# EAGLE board MotorController (EAGLE 7.2.0)
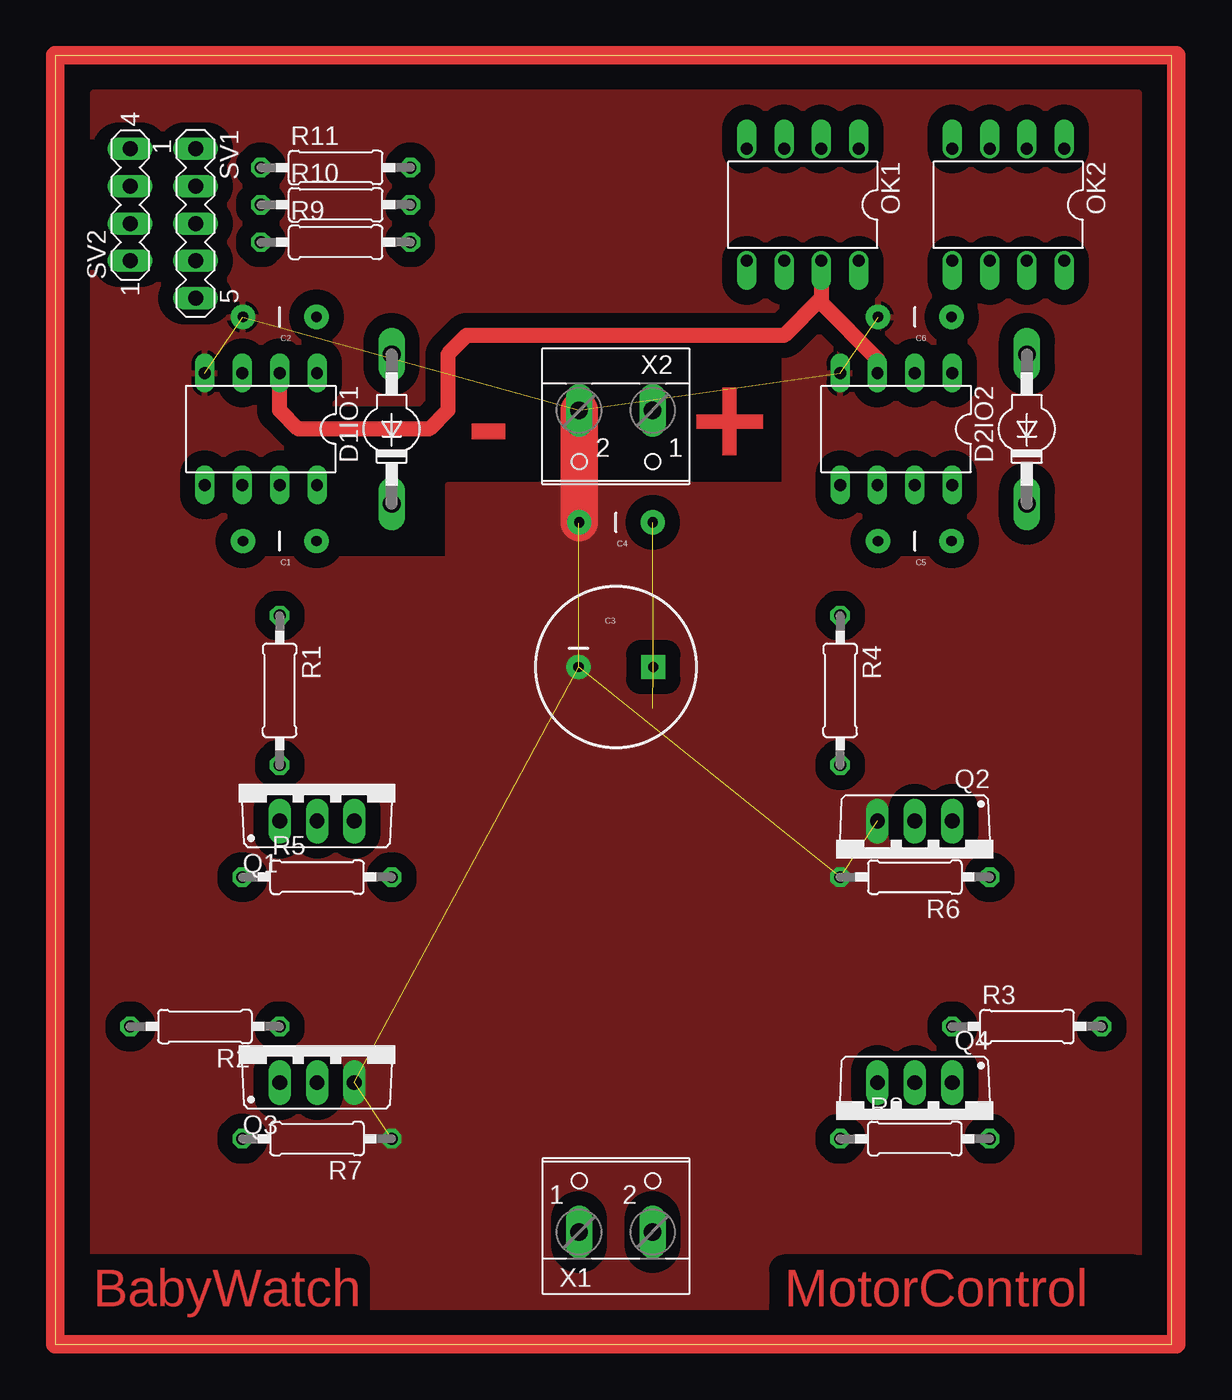
[diagram p0: board, top side]
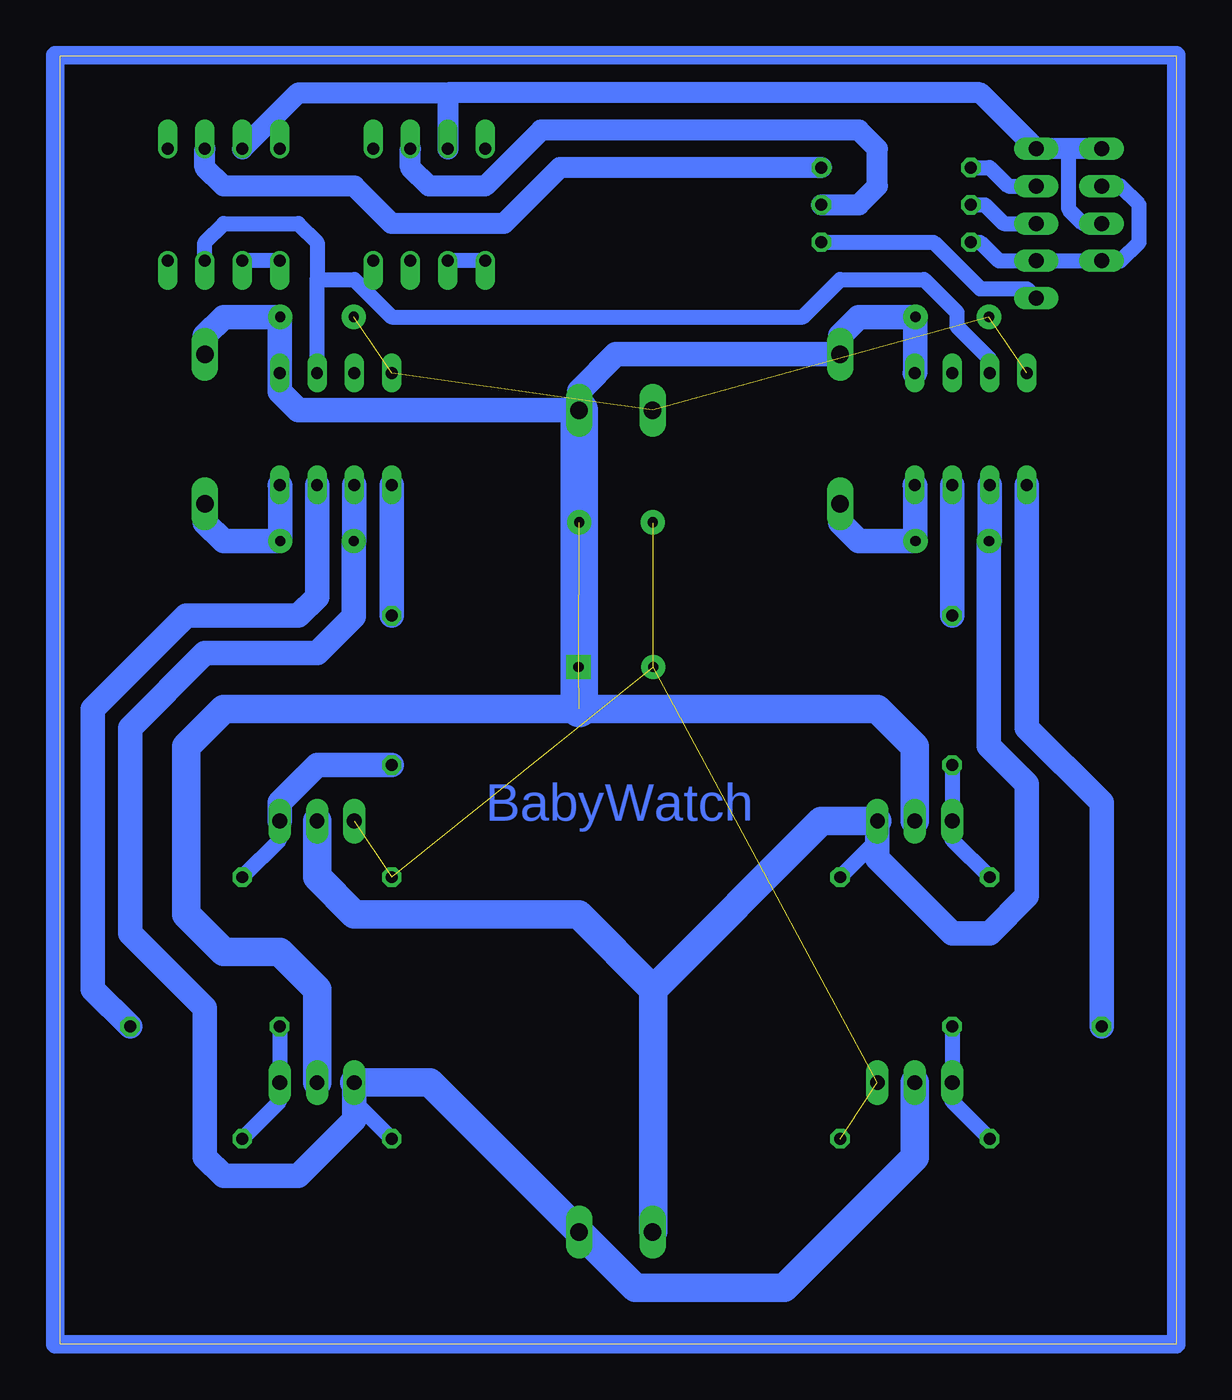
[diagram p1: board, bottom side, seen from below]

Size 75.87 x 87.62 mm. Coordinates in mm from the lower left corner, seen from the top.
Outline: 0,0 75.87,0 75.87,87.62 0,87.62 0,0
Copper layers (1*16): Top 0.035mm / dielectric 1.5mm / Bottom 0.035mm
Design rules "default": minimum track width 10mil, minimum drill 24mil, track to track 8mil, track to pad 8mil, pad to pad 8mil, via to via 8mil, smd to smd 8mil, copper to edge 40mil, drill to drill 8mil, minimum pad ring 10mil, minimum via ring 8mil, stop-mask expansion 4mil, vias tented up to drill 0mil, thermal gap 10mil

## Footprints (pad centres in the part's own frame; a part is rotated, then mirrored left to right if it is on the bottom)
CAP-PTH-5MM = drill 0.7 pad 1.651: 1 -2.5,0; 2 2.5,0
CPOL-RADIAL-1000UF-25V = drill 0.7 pad 1.651 square: 1 2.54,0 | drill 0.7 pad 1.651: 2 -2.54,0
SOD57-10 = drill 1.194 long: A 5.08,0; C -5.08,0
DIL08 = drill 0.813 long: 1 -3.81,-3.81; 2 -1.27,-3.81; 3 1.27,-3.81; 4 3.81,-3.81; 5 3.81,3.81; 6 1.27,3.81; 7 -1.27,3.81; 8 -3.81,3.81
DIL08' = drill 0.813 offset: 1 -3.81,-3.81; 2 -1.27,-3.81; 3 1.27,-3.81; 4 3.81,-3.81; 5 3.81,3.81; 6 1.27,3.81; 7 -1.27,3.81; 8 -3.81,3.81
TO220BV = drill 1.016 long: D 0,-2.54; G -2.54,-2.54; S 2.54,-2.54
0207/10 = drill 0.813 octagon: 1 -5.08,0; 2 5.08,0
MA05-1 = drill 1.016 long: 1 -5.08,0; 2 -2.54,0; 3 0,0; 4 2.54,0; 5 5.08,0
MA04-1 = drill 1.016 long: 1 -3.81,0; 2 -1.27,0; 3 1.27,0; 4 3.81,0
W237-102 = drill 1.194 long: 1 -2.5,-1.27; 2 2.5,-1.27

## Placement (x,y rotation side)
C1  22uF  [CAP-PTH-5MM]  15.24,54.61 180 top
C2  100nF  [CAP-PTH-5MM]  15.24,69.85 180 top
C3  4700uF  [CPOL-RADIAL-1000UF-25V]  38.1,46.04 0 top
C4  1uF  [CAP-PTH-5MM]  38.1,55.88 180 top
C5  22uF  [CAP-PTH-5MM]  58.42,54.61 180 top
C6  100nF  [CAP-PTH-5MM]  58.42,69.85 180 top
D1  BYV95  [SOD57-10]  22.86,62.23 90 top
D2  BYV95  [SOD57-10]  66.04,62.23 90 top
IO1  IR2101  [DIL08]  13.97,62.23 180 top
IO2  IR2101  [DIL08]  57.15,62.23 180 top
OK1  HCPL2200  [DIL08']  50.8,77.47 180 top
OK2  HCPL2200  [DIL08']  64.77,77.47 180 top
Q1  IRF512  [TO220BV]  17.78,38.1 0 top
Q2  IRF512  [TO220BV]  58.42,33.02 180 top
Q3  IRF512  [TO220BV]  17.78,20.32 0 top
Q4  IRF512  [TO220BV]  58.42,15.24 180 top
R1  10 Ohm  [0207/10]  15.24,44.45 270 top
R2  10 Ohm  [0207/10]  10.16,21.59 180 top
R3  10 Ohm  [0207/10]  66.04,21.59 0 top
R4  10 Ohm  [0207/10]  53.34,44.45 270 top
R5  1kOhm  [0207/10]  17.78,31.75 0 top
R6  1kOhm  [0207/10]  58.42,31.75 180 top
R7  1kOhm  [0207/10]  17.78,13.97 180 top
R8  1kOhm  [0207/10]  58.42,13.97 0 top
R9  10 Ohm  [0207/10]  19.05,74.93 0 top
R10  620 Ohm  [0207/10]  19.05,77.47 0 top
R11  620 Ohm  [0207/10]  19.05,80.01 0 top
SV1  [MA05-1]  9.53,76.2 270 top
SV2  [MA04-1]  5.08,77.47 90 top
X1  [W237-102]  38.1,8.89 0 top
X2  [W237-102]  38.1,62.23 180 top

## Library data of the parts
C1-C6 = SparkFun-Passives
D1 D2 = diode
IO1 IO2 = drivers
OK1 OK2 = optocoupler; MF: AGILENT TECHNOLOGIES; MPN: HCPL-2200; OC_FARNELL: 326720; OC_NEWARK: 06F5425
Q1-Q4 = transistor-power
R1-R11 = rcl
SV1 SV2 = con-lstb; OC_FARNELL: unknown; OC_NEWARK: unknown
X1 X2 = con-wago-500; MPN: 237-102; OC_FARNELL: unknown; OC_NEWARK: 70K9898

## Nets
+3V3: R9.2 SV1.5
AGND: OK1.3 OK2.3 SV1.1 SV2.2 SV2.4
ES_SIG: R9.1 SV1.4 SV2.1 SV2.3
GND: C2.2 C3.2 C4.2 C6.2 IO1.4 IO2.4 Q2.S Q3.S R6.2 R7.1 X2.2
M_A: IO1.2 IO2.3 OK1.7
M_AH: IO1.7 R1.1
M_AL: IO1.5 R2.2
M_B: IO1.3 IO2.2 OK2.7
M_BH: IO2.7 R3.2
M_BL: IO2.5 R4.1
MOT_A: C1.2 IO1.6 Q1.S Q2.D R5.2 X1.1
MOT_B: C5.2 IO2.6 Q3.D Q4.S R8.1 X1.2
N$2: C5.1 D2.C IO2.8
N$3: Q1.G R1.2 R5.1
N$4: Q2.G R4.2 R6.1
N$5: Q4.G R3.1 R8.2
N$6: Q3.G R2.1 R7.2
N$8: C1.1 D1.C IO1.8
N$10: OK1.2 R10.2
N$11: OK2.2 R11.2
N$14: OK2.5 OK2.6
N$16: OK1.5 OK1.6
PWM: R10.1 SV1.3
PWM_N: R11.1 SV1.2
VCC: C2.1 C3.1 C4.1 C6.1 D1.A D2.A IO1.1 IO2.1 Q1.D Q4.D X2.1

## Tracks (layer width: path | path; a pad name or v marks a point on that pad's centre or on a via)
+3V3
  Bottom 1.016: R9.2 16.51,74.93 13.34,71.75 10.16,71.75 SV1.5
AGND
  Bottom 1.016: SV2.2 6.35,76.2 7.3,77.15 7.3,81.28
  Bottom 1.422: SV2.4 7.3,81.28 SV1.1 13.34,85.09 49.53,85.09 | 49.53,85.09 OK1.3 | OK2.3 59.69,85.09 49.53,85.09
ES_SIG
  Bottom 1.016: SV2.3 3.81,78.74 2.54,77.47 2.54,74.93 3.81,73.66 SV2.1 SV1.4 12.06,73.66 13.34,74.93 R9.1
GND  (9 unrouted)
  Top 1.676: 35.56,55.84 C4.2
  Top 2.54: C4.2 X2.2
  pour Top (isolate 1.016): 2.54,53.34 26.67,53.34 26.67,67.31 49.53,67.31 49.53,53.34 73.66,53.34 73.66,85.09 2.54,85.09
  pour Top (isolate 1.016, no thermals): 49.53,58.42 26.67,58.42 26.67,53.34 2.54,53.34 2.54,2.54 73.66,2.54 73.66,53.34 49.53,53.34
M_A
  Top 1.016: 52.07,71.12 52.07,70.8 55.88,66.99 IO2.3 | OK1.7 52.07,71.12 | 52.07,71.12 49.53,68.58 27.94,68.58 26.67,67.31 26.67,63.5 25.4,62.23 16.51,62.23 15.24,63.5 IO1.2
M_AH
  Bottom 1.676: IO1.7 R1.1
M_AL
  Bottom 1.676: IO1.5 10.16,41.91 5.08,36.83 R2.2
M_B
  Bottom 1.016: OK2.7 66.04,74.93 64.77,76.2 59.69,76.2 58.42,74.93 58.42,72.39 | IO2.2 58.42,72.39 | 58.42,72.39 55.88,72.39 53.34,69.85 25.4,69.85 22.86,72.39 17.14,72.39 14.92,70.17 14.92,69.22 12.7,66.99 IO1.3
M_BH
  Bottom 1.676: IO2.7 58.42,50.8 59.69,49.53 67.31,49.53 73.66,43.18 73.66,24.13 R3.2
M_BL
  Bottom 1.676: IO2.5 R4.1
MOT_A
  Bottom 1.016: R5.2 20.32,34.29 Q1.S
  Bottom 1.676: X1.1 35.56,7.66 | IO1.6 12.7,54.65 C1.2 12.74,40.68 10.16,38.1 10.16,30.48 12.7,27.94 15.24,27.94 20.32,33.02 Q1.S
  Bottom 1.93: 35.56,7.66 35.56,24.13 | 35.56,24.13 24.13,35.56 Q1.S | Q2.D 58.42,31.75 55.88,29.21 40.64,29.21 35.56,24.13
MOT_B
  Bottom 1.016: Q4.S 55.88,16.51 R8.1
  Bottom 1.676: IO2.6 55.88,54.65 C5.2 55.92,49.49 58.42,46.99 66.04,46.99 71.12,41.91 71.12,27.94 66.04,22.86 66.04,12.7 64.77,11.43 59.69,11.43 55.88,15.24 Q4.S
  Bottom 1.93: Q4.S 50.76,17.78 X1.2 36.79,3.81 26.67,3.81 17.78,12.7 Q3.D
N$1
  Bottom 1.27: 0,87.63 76.2,87.63 76.2,0 0,0 0,87.63
N$2
  Bottom 1.676: D2.C 66.04,55.88 64.77,54.61 C5.1 60.92,58.38 IO2.8
N$3
  Bottom 1.016: R1.2 Q1.G 15.24,34.29 R5.1
N$4
  Bottom 1.016: Q2.G 60.96,34.29 R6.1
  Bottom 1.676: R4.2 58.42,39.37 60.96,36.83 Q2.G
N$5
  Bottom 1.016: R3.1 Q4.G 60.96,16.51 R8.2
N$6
  Bottom 1.016: R2.1 Q3.G 15.24,16.51 R7.2
N$7
  Top 1.27: 0,87.63 76.2,87.63 76.2,0 0,0 0,87.63
N$8
  Bottom 1.676: D1.C 22.86,55.88 21.59,54.61 C1.1 17.74,58.38 IO1.8
N$10
  Bottom 1.422: R10.2 21.59,77.47 20.32,78.74 20.32,81.28 21.59,82.55 43.18,82.55 46.99,78.74 50.8,78.74 52.07,80.01 OK1.2
N$11
  Bottom 1.422: R11.2 41.91,80.01 45.72,76.2 53.34,76.2 55.88,78.74 64.77,78.74 66.04,80.01 OK2.2
N$14
  Bottom 1.016: OK2.5 OK2.6
N$16
  Bottom 1.016: OK1.5 OK1.6
PWM
  Bottom 1.016: R10.1 13.02,77.47 11.75,76.2 SV1.3
PWM_N
  Bottom 1.016: R11.1 12.7,80.01 11.43,78.74 SV1.2
VCC  (2 unrouted)
  Bottom 1.676: 31.71,43.22 34.29,43.18 | D2.A 66.04,68.58 64.77,69.85 C6.1 60.96,69.81 IO2.1 60.96,64.77 59.69,63.5 X2.1 40.6,64.81 38.1,67.31 D1.A 22.86,68.58 21.59,69.85 C2.1 17.74,66.08 IO1.1
  Bottom 1.93: Q4.D 58.42,24.13 60.96,26.67 64.77,26.67 67.31,29.21 67.31,40.64 64.77,43.18 40.64,43.18 34.29,43.18 20.32,43.18 17.78,40.64 Q1.D
  Bottom 2.184: 40.6,43.22 40.64,43.18
  Bottom 2.54: X2.1 40.6,43.22

## Text on the board
Top: - | + | BabyWatch | MotorControl
Bottom: BabyWatch